# EAGLE board LB_SMD (EAGLE 5.11)
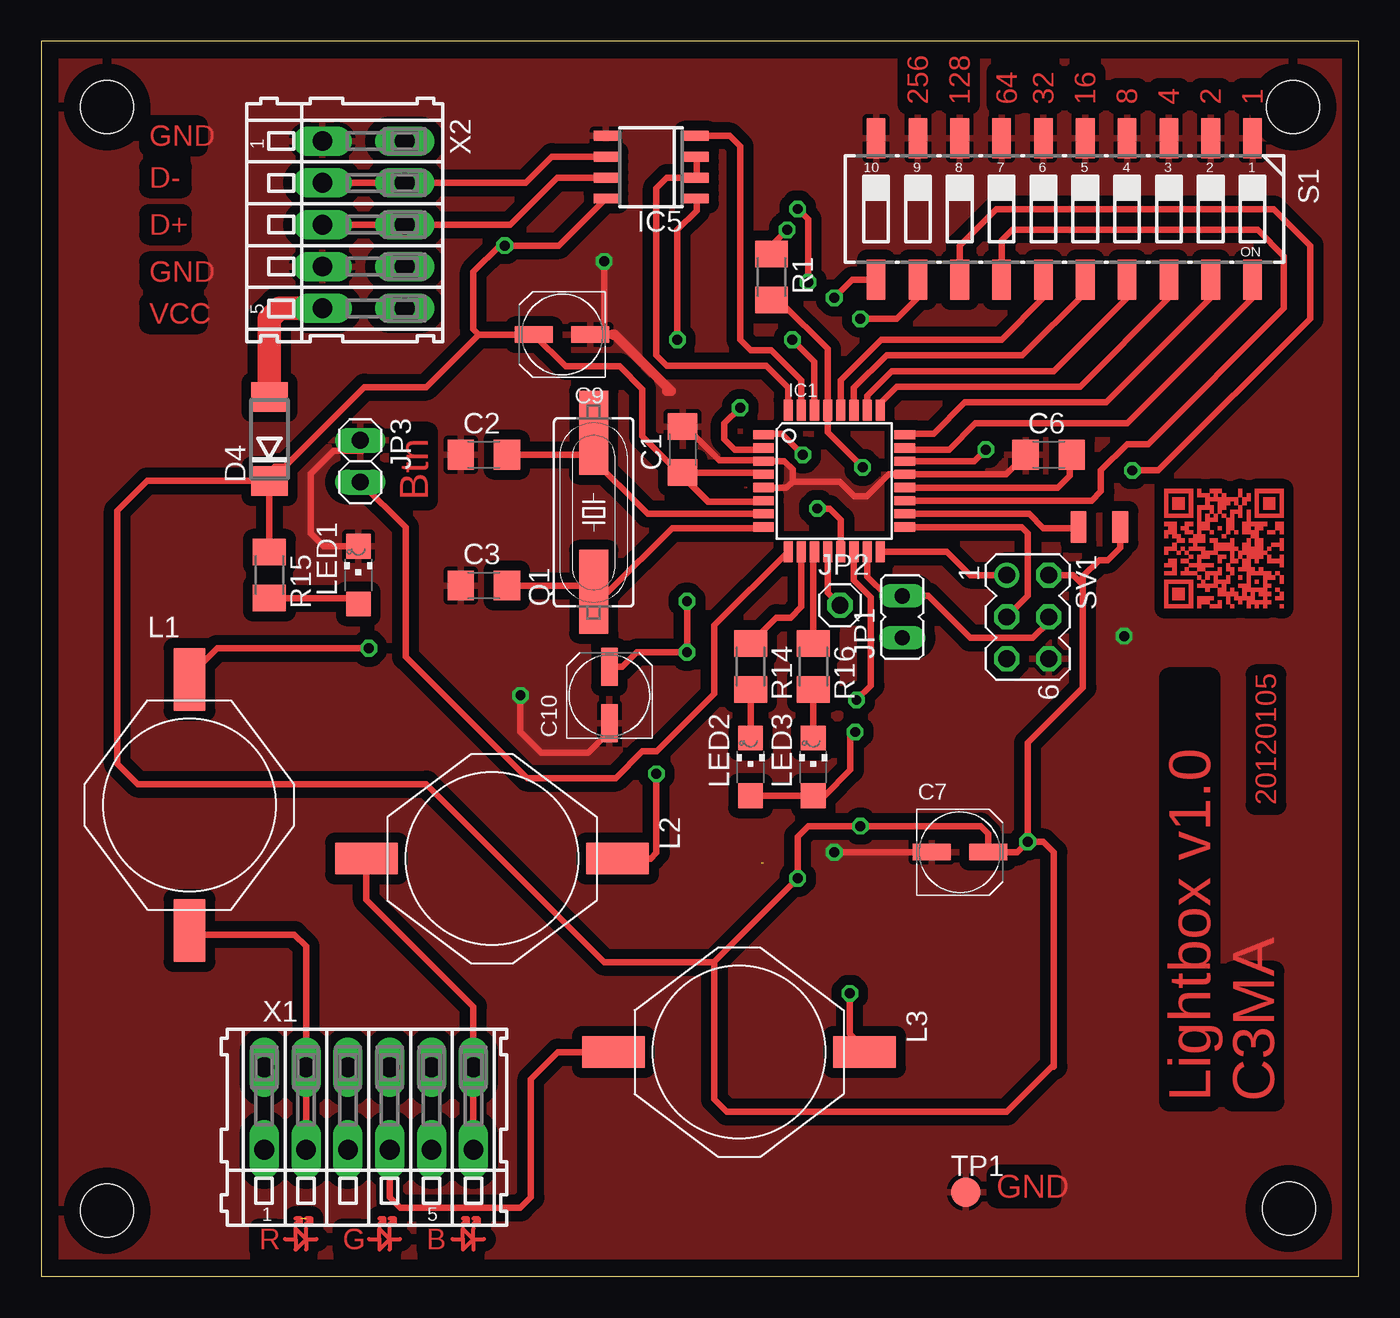
[diagram p0: board, top side]
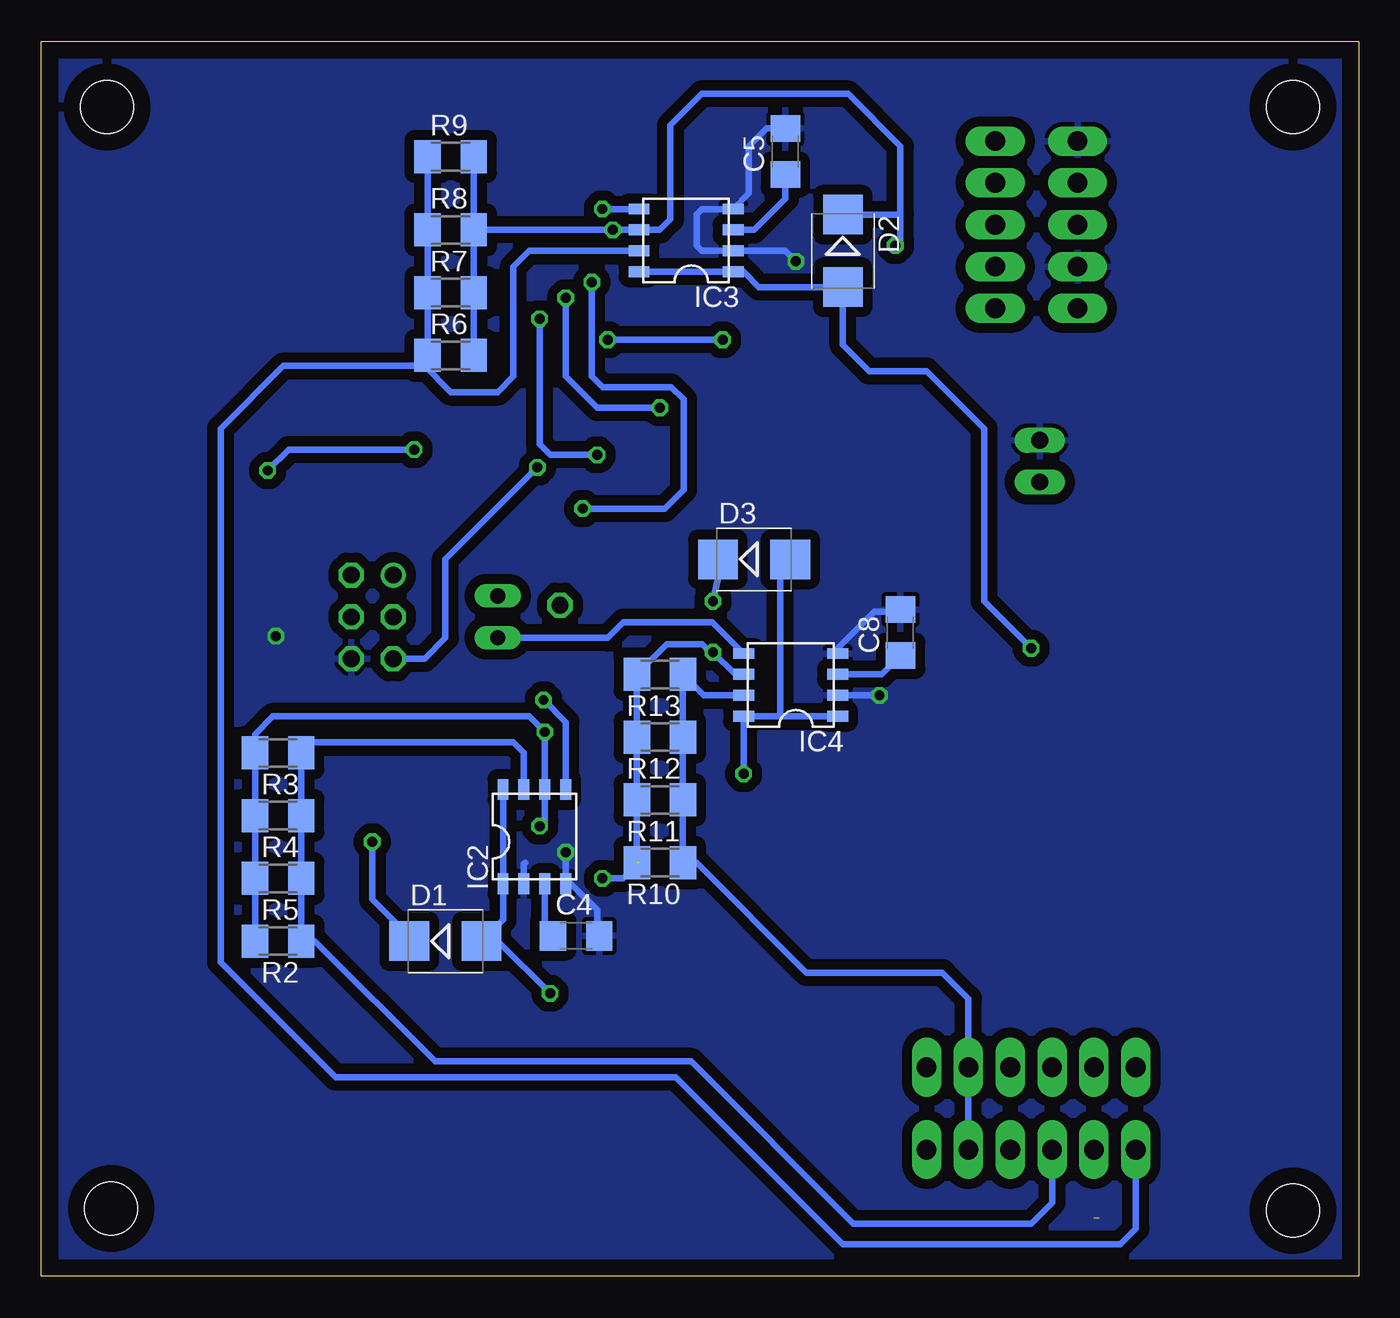
[diagram p1: board, bottom side, seen from below]

Size 80 x 75 mm. Coordinates in mm from the lower left corner, seen from the top.
Outline: 0,0 80,0 80,75 0,75 0,0
Copper layers (1*16): Top 0.035mm / dielectric 1.5mm / Bottom 0.035mm
Design rules "default": minimum track width 10mil, minimum drill 24mil, track to track 8mil, track to pad 8mil, pad to pad 8mil, via to via 8mil, smd to smd 8mil, copper to edge 40mil, drill to drill 8mil, minimum pad ring 10mil, minimum via ring 8mil, stop-mask expansion 4mil, vias tented up to drill 0mil, thermal gap 10mil
Holes 3.2 mm at 4,71 4,4 76,71 75.75,4.12

## Footprints (pad centres in the part's own frame; a part is rotated, then mirrored left to right if it is on the bottom)
C1206 = smd 1.6 x 1.8: 1 -1.4,0; 2 1.4,0
UD-5X5,8_NICHICON = smd 2.3 x 1: + 1.725,0; - -1.7,0
SMB = smd 2.4 x 2.4: A 2.2,0; C -2.2,0
DO214AA = smd 1.8 x 2.2: A 2.55,0; C -2.55,0
TQFP32-08 = smd 1.27 x 0.559: 1 -4.293,2.8; 2 -4.293,2; 3 -4.293,1.2; 4 -4.293,0.4; 5 -4.293,-0.4; 6 -4.293,-1.2; 7 -4.293,-2; 8 -4.293,-2.8; 17 4.293,-2.8; 18 4.293,-2; 19 4.293,-1.2; 20 4.293,-0.4; 21 4.293,0.4; 22 4.293,1.2; 23 4.293,2; 24 4.293,2.8 | smd 0.559 x 1.27: 9 -2.8,-4.293; 10 -2,-4.293; 11 -1.2,-4.293; 12 -0.4,-4.293; 13 0.4,-4.293; 14 1.2,-4.293; 15 2,-4.293; 16 2.8,-4.293; 25 2.8,4.293; 26 2,4.293; 27 1.2,4.293; 28 0.4,4.293; 29 -0.4,4.293; 30 -1.2,4.293; 31 -2,4.293; 32 -2.8,4.293
DIL08 = smd 0.66 x 1.27: P$1 -4.445,-2.54; P$2 -3.175,-2.54; P$3 -1.905,-2.54; P$4 -0.635,-2.54; P$5 -0.635,3.175; P$6 -1.905,3.175; P$7 -3.175,3.175; P$8 -4.445,3.175
D_R-PDSO-G8 = smd 0.6 x 1.5: 1 -1.905,-2.75; 2 -0.635,-2.75; 3 0.635,-2.75; 4 1.905,-2.75; 5 1.905,2.75; 6 0.635,2.75; 7 -0.635,2.75; 8 -1.905,2.75
JP1 = drill 0.914 long: 1 0,-1.27; 2 0,1.27
1X01 = drill 1.016 octagon: 1 0,0
1X02 = drill 1.016 long: 1 -1.27,0; 2 1.27,0
PIS2408 = smd 1.9 x 1.4: P$1 0,7.83; P$2 0,-7.83 | smd 1.93 x 3.81: P$3 0,7.62; P$4 0,-7.62
1206F = smd 0.965 x 1.93: P$1 -1.27,0; P$2 1.27,0
CHIPLED_1206 = smd 1.5 x 1.5: A 0,-1.75; C 0,1.75
SM49 = smd 5.08 x 1.778: 1 -4.826,0; 2 4.826,0
M1206 = smd 1.6 x 2: 1 -1.4,0; 2 1.4,0
CTS-219-10 = smd 1.13 x 2.44: 1 -11.43,-4.3; 2 -8.89,-4.3; 3 -6.35,-4.3; 4 -3.81,-4.3; 5 -1.27,-4.3; 6 1.27,-4.3; 7 3.81,-4.3; 8 6.35,-4.3; 9 8.89,-4.3; 10 11.43,-4.3; 11 11.43,4.3; 12 8.89,4.3; 13 6.35,4.3; 14 3.81,4.3; 15 1.27,4.3; 16 -1.27,4.3; 17 -3.81,4.3; 18 -6.35,4.3; 19 -8.89,4.3; 20 -11.43,4.3
MA03-2 = drill 1.016 round: 1 -2.54,-1.27 | drill 1.016 octagon: 2 -2.54,1.27; 3 0,-1.27; 4 0,1.27; 5 2.54,-1.27; 6 2.54,1.27
TP18R = smd 1.8 x 1.8: TP 0,0
233-506 = drill 1.2 long: A1 -6.35,2.5; A2 -3.81,2.5; A3 -1.27,2.5; A4 1.27,2.5; A5 3.81,2.5; A6 6.35,2.5; B1 -6.35,-2.5; B2 -3.81,-2.5; B3 -1.27,-2.5; B4 1.27,-2.5; B5 3.81,-2.5; B6 6.35,-2.5
233-505 = drill 1.2 long: A1 -5.08,2.5; A2 -2.54,2.5; A3 0,2.5; A4 2.54,2.5; A5 5.08,2.5; B1 -5.08,-2.5; B2 -2.54,-2.5; B3 0,-2.5; B4 2.54,-2.5; B5 5.08,-2.5

## Placement (x,y rotation side)
C1  100n  [C1206]  38.94,50.2 90 top
C2  22p  [C1206]  26.88,49.89 0 top
C3  22p  [C1206]  26.88,41.95 0 top
C4  100p  [C1206]  47.52,20.68 0 bottom
C5  60p  [C1206]  34.81,68.3 90 bottom
C6  100n  [C1206]  61.17,49.89 0 top
C7  47u  [UD-5X5,8_NICHICON]  55.77,25.76 0 top
C8  100p  [C1206]  27.83,39.09 90 bottom
C9  47u  [UD-5X5,8_NICHICON]  31.64,57.19 180 top
C10  47u  [UD-5X5,8_NICHICON]  34.5,35.28 90 top
D1  MBRS120  [SMB]  55.45,20.36 0 bottom
D2  MBRS120  [SMB]  31.32,62.27 270 bottom
D3  MBRS120  [SMB]  36.72,43.54 0 bottom
D4  MBRS 340  [DO214AA]  13.86,50.84 90 top
IC1  MEGA8-AI  [TQFP32-08]  48.15,48.3 0 top
IC2  MC34063AD  [DIL08]  47.52,26.39 0 bottom
IC3  MC34063AD  [DIL08]  40.53,65.44 90 bottom
IC4  MC34063AD  [DIL08]  34.18,38.46 90 bottom
IC5  75176AD  [D_R-PDSO-G8]  37.04,67.35 90 top
JP1  [JP1]  52.28,40.05 0 top
JP2  [1X01]  48.5,40.75 0 top
JP3  [1X02]  19.38,49.5 270 top
L1  L-PISR 470u  [PIS2408]  9,28.62 0 top
L2  L-PISR 470u  [PIS2408]  27.38,25.38 270 top
L3  L-PISR 470u  [PIS2408]  42.38,13.62 270 top
L4  10u  [1206F]  64.25,45.5 180 top
LED1  SMD LED 1206 RT  [CHIPLED_1206]  19.26,42.59 0 top
LED2  SMD LED 1206 GN  [CHIPLED_1206]  43.07,30.93 0 top
LED3  SMD LED 1206 GN  [CHIPLED_1206]  46.88,30.93 0 top
Q1  8,0000-HC49 SMD  [SM49]  33.55,46.4 90 top
R1  10k  [M1206]  44.34,60.68 270 top
R2  1,0  [M1206]  65.61,20.36 180 bottom
R3  1,0  [M1206]  65.61,31.79 180 bottom
R4  1,0  [M1206]  65.61,27.98 180 bottom
R5  2,2  [M1206]  65.61,24.17 180 bottom
R6  1,0  [M1206]  55.13,55.92 0 bottom
R7  1,0  [M1206]  55.13,59.73 0 bottom
R8  1,0  [M1206]  55.13,63.54 0 bottom
R9  2,2  [M1206]  55.13,67.98 0 bottom
R10  1,0  [M1206]  42.44,25.12 180 bottom
R11  1,0  [M1206]  42.44,28.93 180 bottom
R12  1,0  [M1206]  42.44,32.74 180 bottom
R13  2,2  [M1206]  42.44,36.55 180 bottom
R14  150  [M1206]  43.07,37.03 270 top
R15  150  [M1206]  13.86,42.59 270 top
R16  150  [M1206]  46.88,37.03 270 top
S1  NT-10 SMD  [CTS-219-10]  62.12,64.81 180 top
SV1  WSL 6G  [MA03-2]  59.9,40.05 270 top
TP1  TPTP18R  [TP18R]  56.12,5.12 0 top
X1  [233-506]  19.89,10.2 0 top
X2  [233-505]  19.57,63.86 270 top

## Library data of the parts
C1-C10 R1-R16 = rcl
D1-D4 = diode
IC1 = atmel; MPN: ATMEGA8-16AU; OC_FARNELL: 9171371; OC_NEWARK: 73M8863
IC2-IC4 = MC34063AD
IC5 = 751xx
JP1 = jumper
JP2 JP3 = pinhead
L1-L3 = inductor-fastron_pisr
L4 = inductor-fastron
LED1-LED3 = led
Q1 = crystal; OC_FARNELL: unknown; OC_NEWARK: unknown
S1 = switch-dil; MF: SLI (CML/IDI); MPN: 219-10PK; OC_FARNELL: unknown; OC_NEWARK: 19M0224
SV1 = con-lstb; OC_FARNELL: unknown; OC_NEWARK: unknown
TP1 = testpad
X1 = con-wago; MF: Wago Corporation; MPN: 0233-0506; OC_FARNELL: 1777100; OC_NEWARK: 79K2052
X2 = con-wago; MF: Wago Corporation; MPN: 0233-0505; OC_FARNELL: unknown; OC_NEWARK: 79K2051

## Nets
+5V: C1.1 C7.+ C9.+ C10.+ D1.C D2.C D3.C D4.C IC1.4 IC1.6 IC2.P$6 IC3.P$6 IC4.P$6 IC5.8 L4.P$1 LED2.A LED3.A R1.1 R2.2 R3.2 R4.2 R5.2 R6.2 R7.2 R8.2 R9.2 R10.2 R11.2 R12.2 R13.2 R15.1 SV1.2
B_L: L2.P$2 X1.B6
B_R: IC4.P$7 R10.1 R11.1 R12.1 R13.1 X1.B5
BUTTON: IC1.9 JP3.2
D+: IC5.7 X2.B3
D-: IC5.6 X2.B2
G_L: L3.P$2 X1.B4
G_R: IC2.P$7 R2.1 R3.1 R4.1 R5.1 X1.B3
GND: C1.2 C2.1 C3.1 C4.2 C5.2 C6.1 C7.- C8.2 C9.- C10.- IC1.3 IC1.5 IC1.21 IC2.P$2 IC2.P$4 IC3.P$2 IC3.P$4 IC4.P$2 IC4.P$4 IC5.5 JP3.1 LED1.C S1.1 S1.2 S1.3 S1.4 S1.5 S1.6 S1.7 S1.8 S1.9 S1.10 SV1.6 TP1.TP X2.B1 X2.B4
INT_DMX: IC1.32 IC5.2 IC5.3
MISO: IC1.16 SV1.1
MOSI: IC1.15 JP1.2 SV1.4
N$2: C3.2 IC1.8 Q1.1
N$3: C2.2 IC1.7 Q1.2
N$7: IC1.23 S1.20
N$9: C6.2 IC1.20
N$14: IC1.18 L4.P$2
N$15: IC1.24 S1.19
N$16: IC1.25 S1.18
N$17: IC1.26 S1.17
N$18: IC1.27 S1.16
N$19: IC1.28 S1.15
N$20: IC1.19 S1.14
N$21: D3.A IC4.P$1 IC4.P$8 L2.P$1
N$22: IC1.22 S1.13
N$27: IC1.10 R14.1
N$28: LED2.C R14.2
N$29: D4.A X2.B5
N$30: LED1.A R15.2
N$31: IC1.11 R16.1
N$33: LED3.C R16.2
N$45: C5.1 IC3.P$3
N$47: D2.A IC3.P$1 IC3.P$8 L1.P$1
N$52: C4.1 IC2.P$3
N$53: D1.A IC2.P$1 IC2.P$8 L3.P$1
N$59: C8.1 IC4.P$3
PWM_BLUE: IC4.P$5 JP1.1
PWM_GREEN: IC1.14 IC2.P$5
PWM_RED: IC1.13 IC3.P$5
R_L: L1.P$2 X1.B2
R_R: IC3.P$7 R6.1 R7.1 R8.1 R9.1 X1.B1
RESERVE: IC1.12 JP2.1
RESET: IC1.29 R1.2 SV1.5
RXD: IC1.30 IC5.1
SCK: IC1.17 SV1.3
T9: IC1.1 S1.12
T10: IC1.2 S1.11
TXD: IC1.31 IC5.4

## Tracks (layer width: path | path; a pad name or v marks a point on that pad's centre or on a via)
+5V  (via drill 0.6)  (1 unrouted)
  Top 0.406: D4.C R15.1 | D4.C 14.17,48.29 14.17,49.17 14.79,49.17 19.62,54 23.37,54 26.56,57.19 | IC5.8 31.43,62.59 v28.15,62.59 27.83,62.59 26.24,61 26.24,57.51 26.56,57.19 | 26.56,57.19 C9.+ 31.86,55.25 35.12,55.25 36.5,53.88 36.5,51 40.47,47.03 40.53,47.03 | R1.1 44.34,62.59 v45.29,63.54 | v59.9,26.39 59.26,25.76 C7.+ 57.49,26.89 57.04,27.34 v49.74,27.34 46.56,27.34 45.93,26.71 v45.93,24.17 40.85,19.09 | LED2.A LED3.A 47.56,29.18 49.12,30.75 49.12,32.77 v49.42,33.06 | C10.+ 35.27,37.01 36.16,37.9 v39.21,37.9 v39.21,41 | v59.9,26.39 60.85,26.39 61.48,25.76 61.48,12.74 61.37,12.74 58.62,10 41.62,10 40.88,10.75 40.88,19.06 40.85,19.09 | D4.C 6.42,48.3 4.62,46.5 4.62,31.12 5.87,29.89 23.39,29.89 34.18,19.09 40.85,19.09 | 40.53,47.03 38.94,48.62 C1.1 43.75,48.8 IC1.4 | 40.53,47.03 43.79,47.03 IC1.6 | v59.9,26.39 59.9,32.4 63.25,35.75 63.25,42 | SV1.2 62.66,42.59 63.25,42 | 63.25,42 63.25,42.5 64.25,43.5 64.75,43.5 65.5,44.25 65.5,45.48 L4.P$1
  Bottom 0.406: R6.2 R7.2 R8.2 | R8.2 R9.2 | R8.2 v45.29,63.54 IC3.P$6 42.44,63.54 41.8,64.17 41.8,69.89 39.9,71.8 31,71.8 27.83,68.62 27.83,64.49 | R2.2 R5.2 R4.2 R3.2 67.01,32.93 65.93,34.01 50.37,34.01 v49.42,33.06 IC2.P$6 49.42,27.66 v49.74,27.34 | R13.2 R12.2 R11.2 R10.2 | R13.2 43.7,36.68 | 27.83,64.49 27.83,62.91 v28.15,62.59 | D1.C 57.65,20.66 59.9,22.9 v59.9,26.39 | D2.C 27.85,64.47 27.83,64.49 | v45.93,24.17 44.66,24.17 43.7,25.12 | D3.C 38.92,42.29 v39.21,41 | IC4.P$6 37.87,36.55 v39.21,37.9 39.4,37.9 39.88,38.38 42.01,38.38 R13.2
B_L
  Top 0.406: X1.B6 26.24,16.38 19.75,22.88 19.75,25.17 L2.P$2
B_R
  Bottom 0.406: IC4.P$7 39.77,35.28 R13.1 R12.1 R11.1 R10.1 40.21,25.12 33.55,18.45 25.29,18.45 23.7,16.87 X1.B5
BUTTON
  Top 0.406: IC1.9 40.88,39.53 40.88,35.38 37.38,31.88 36.5,31.88 34.88,30.25 29.5,30.25 22.12,37.62 22.12,45.48 JP3.2
D+
  Top 0.406: IC5.7 31.32,66.72 28.46,63.86 X2.B3
D-
  Top 0.406: X2.B2 29.42,66.4 31,67.98 IC5.6
G_L
  Top 0.406: X1.B4 21.16,4.8 21.8,4.17 29.1,4.17 29.73,4.8 29.73,11.98 31.38,13.62 L3.P$2
G_R
  Bottom 0.406: IC2.P$7 50.69,31.79 51.33,32.42 64.34,32.42 64.21,32.3 R3.1 R4.1 R5.1 R2.1 63.39,20.36 56.09,13.06 40.53,13.06 30.69,3.21 19.89,3.21 18.62,4.49 X1.B3
GND  (via drill 0.6)
  Top 0.406: C9.- 34.18,57.19 | v48.15,25.76 C7.- | C10.- 34.5,33.06 33.23,31.79 30.37,31.79 29.1,33.06 v29.1,35.28 | 34.18,57.19 v34.18,61.63 | C6.1 58.58,48.7 IC1.21 51.45,48.7 50.12,47.38 49.38,47.38 48.5,48.25 45.62,48.25 | C1.2 39.13,51.6 41.16,49.57 43.79,49.57 IC1.3 45.12,49.5 45.62,49 45.62,48.25 | 34.18,57.19 34.69,57.19 | LED1.C 17.16,44.34 16.38,45.12 16.38,48.75 17.75,50.12 19.48,50.12 JP3.1 | 45.62,48.25 45.25,47.88 43.88,47.88 IC1.5
  Top 0.61: 34.69,57.19 34.81,57.19 38.25,53.75 38,53.75
  Bottom 0.406: C5.2 35.95,69.7 37.04,68.62 37.04,65.76 IC3.P$4 39.9,64.81 40.21,64.49 40.21,62.59 39.9,62.27 IC3.P$2 34.81,62.27 v34.18,61.63 | C4.2 46.24,20.81 46.24,22.27 47.83,23.85 IC2.P$4 v48.15,25.76 | C8.2 27.96,40.36 29.42,40.36 31.64,38.14 IC4.P$4 | v29.1,35.28 IC4.P$2 | IC2.P$2 50.69,25.06 50.62,25.12
  other vias: 65.75,38.88
  pour Top (isolate 0.61): 0.88,74.25 79.25,74.25 79.25,0.62 0.88,0.62
  pour Bottom (isolate 0.61): 1.12,74 79,74 79,1.12 1.12,1.12
INT_DMX
  Top 0.406: IC1.32 45.35,53.96 44.02,55.28 37.99,55.28 37.35,55.92 37.35,66.08 37.99,66.72 IC5.2 IC5.3
MISO
  Top 0.406: IC1.16 54.98,44.01 56.41,42.59 SV1.1
MOSI
  Top 0.406: IC1.15 50.15,42.49 51.33,41.31 JP1.2 53.87,41.31 56.41,38.77 60.22,38.77 61.17,39.73 SV1.4
N$1
  Top 0.254: 14.81,2.26 15.45,2.26 | 15.45,2.26 15.45,2.9 16.08,2.26 15.45,1.63 15.45,2.26
N$2
  Top 0.406: IC1.8 43.8,45.44 38.31,45.44 34.43,41.57 Q1.1 33.16,41.95 C3.2
N$3
  Top 0.406: C2.2 33.23,49.89 | 33.23,49.89 33.23,50.9 Q1.2 | IC1.7 36.81,46.3 33.23,49.89
N$4
  Top 0.254: 16.08,2.26 16.08,2.9 | 16.08,2.26 16.08,1.63 | 16.08,2.26 16.72,2.26
N$5  (1 unrouted)
  Top 0.254: 16.4,3.53 16.08,3.21 | 16.4,3.53 16.08,3.53 | 16.4,3.53 16.4,3.21 | 15.77,3.53 15.45,3.53 | 15.77,3.53 15.77,3.21 | 15.45,3.21 15.77,3.53
N$6
  Top 0.254: 19.89,2.26 20.53,2.26 | 20.53,2.26 20.53,2.9 21.16,2.26 | 20.53,2.26 20.53,1.63 21.16,2.26 | 21.16,2.26 21.16,2.9 | 21.16,2.26 21.16,1.63 | 21.16,2.26 21.8,2.26
N$7
  Top 0.406: S1.20 73.55,59.41 65.93,51.79 56.72,51.79 55.13,50.2 52.54,50.2 IC1.23
N$8
  Top 0.254: 20.84,3.53 20.53,3.21 | 20.84,3.53 20.53,3.53 | 20.84,3.21 20.84,3.53
N$9
  Top 0.406: IC1.20 61.72,47.9 62.44,48.62 62.44,49.76 C6.2
N$10
  Top 0.254: 21.48,3.53 21.16,3.21 | 21.48,3.53 21.16,3.53 | 21.48,3.53 21.48,3.21
N$11
  Top 0.254: 24.97,2.26 25.61,2.26 | 25.61,2.26 25.61,2.9 26.24,2.26 | 25.61,2.26 25.61,1.63 26.24,2.26 | 26.24,2.26 26.24,2.9 | 26.24,2.26 26.24,1.63 | 26.24,2.26 26.88,2.26
N$12
  Top 0.254: 25.93,3.53 25.61,3.21 | 25.93,3.53 25.61,3.53 | 25.93,3.21 25.93,3.53
N$13
  Top 0.254: 26.56,3.53 26.24,3.21 | 26.56,3.53 26.24,3.53 | 26.56,3.53 26.56,3.21
N$14
  Top 0.406: IC1.18 59.99,46.3 60.85,45.44 62.98,45.44 L4.P$2
N$15
  Top 0.406: S1.19 71.01,59.41 64.66,53.06 56.09,53.06 54.18,51.16 52.5,51.16 IC1.24
N$16
  Top 0.406: IC1.25 50.95,53.01 51.96,54.02 63.07,54.02 68.47,59.41 S1.18
N$17
  Top 0.406: IC1.26 50.15,53.48 51.64,54.97 61.48,54.97 65.93,59.41 S1.17
N$18
  Top 0.406: IC1.27 49.35,53.95 51.33,55.92 59.58,55.92 63.39,59.73 S1.16
N$19
  Top 0.406: IC1.28 48.55,54.41 51.01,56.87 58.31,56.87 60.85,59.41 S1.15
N$20
  Top 0.406: S1.14 58.31,62.91 58.95,63.54 73.87,63.54 75.45,61.95 75.45,58.78 67.2,50.52 65.93,50.52 64.34,48.94 64.34,47.66 63.78,47.1 IC1.19
N$21  (via drill 0.6)
  Top 0.406: v37.35,30.52 37.35,25.73 37,25.38 L2.P$1
  Bottom 0.406: 35.13,34.01 IC4.P$8 v37.35,30.52 | 35.13,34.01 IC4.P$1 | D3.A 35.13,43.54 35.13,34.01
N$22  (via drill 0.6)
  Top 0.406: S1.13 55.77,62.59 57.99,64.81 74.82,64.81 77.04,62.59 77.04,58.14 67.83,48.94 v66.25,48.94 | IC1.22 56.65,49.5 v57.36,50.2
  Bottom 0.406: v57.36,50.2 64.98,50.2 v66.25,48.94
N$27
  Top 0.406: IC1.10 46.15,40.65 45.5,40 44.63,40 R14.1
N$28
  Top 0.406: LED2.C R14.2
N$29
  Top 1.422: X2.B5 14.49,58.78 13.86,58.14 D4.A
N$30
  Top 0.406: R15.2 18.91,41.19 LED1.A
N$31
  Top 0.406: IC1.11 46.88,44.01 R16.1
N$33
  Top 0.406: LED3.C R16.2
N$45
  Bottom 0.406: C5.1 34.81,65.44 36.72,63.54 IC3.P$3
N$47  (via drill 0.6)
  Top 0.406: v19.89,38.14 10.69,38.14 L1.P$1
  Bottom 0.406: IC3.P$8 IC3.P$1 37.35,61 36.42,60.07 D2.A 31.32,56.55 29.73,54.97 26.24,54.97 22.75,51.48 22.75,41 v19.89,38.14
N$52
  Bottom 0.406: IC2.P$3 49.42,20.68 C4.1
N$53  (via drill 0.6)
  Top 0.406: v49.1,17.18 49.1,14.73 L3.P$1
  Bottom 0.406: IC2.P$8 IC2.P$1 51.96,21.65 D1.A 52.28,20.36 v49.1,17.18
N$59
  Bottom 0.406: C8.1 28.97,36.55 IC4.P$3
PWM_BLUE
  Bottom 0.406: IC4.P$5 39.26,39.73 44.66,39.73 45.61,38.77 JP1.1
PWM_GREEN  (via drill 0.6)
  Top 0.406: IC1.14 49.35,42.27 50.38,41.25 50.38,35.88 v49.5,35
  Bottom 0.406: IC2.P$5 48.15,33.65 v49.5,35
PWM_RED  (via drill 0.6)
  Top 0.406: v45.93,64.81 46.56,64.17 v46.56,60.37 | IC1.13 48.55,45.95 47.88,46.62 v47.12,46.62
  Bottom 0.406: v45.93,64.81 IC3.P$5 | v46.56,60.37 46.56,54.65 45.91,54 41.75,54 41,53.25 41,47.75 42.12,46.62 v47.12,46.62
R_L
  Top 0.406: X1.B2 16.08,20.04 15.38,20.75 9.04,20.75 L1.P$2
R_R
  Bottom 0.406: R9.1 R8.1 R7.1 R6.1 | IC3.P$7 50.37,62.27 51.33,61.32 51.33,54.65 52.28,53.7 55.13,53.7 56.72,55.28 56.72,55.73 R6.1 | X1.B1 13.54,2.9 14.49,1.95 31.32,1.95 41.48,12.11 62.12,12.11 69.11,19.09 69.11,51.48 65.3,55.28 57.17,55.28 R6.1
RESERVE
  Top 0.406: JP2.1 47.75,41.5 IC1.12
RESET  (via drill 0.6)
  Top 0.406: R1.2 44.53,59.09 44.98,59.09 47.75,56.32 IC1.29 47.75,51.25 v49.88,49.12
  Bottom 0.406: SV1.5 56.72,37.51 55.45,38.77 55.45,43.55 v49.88,49.12
RXD  (via drill 0.6)
  Top 0.406: IC5.1 39.79,64.7 38.62,63.54 v38.62,56.87 | IC1.30 46.95,55.53 v45.61,56.87
  Bottom 0.406: v38.62,56.87 v45.61,56.87
SCK
  Top 0.406: IC1.17 59.52,45.5 59.9,45.12 59.9,41.31 SV1.3
T9  (via drill 0.6)
  Top 0.406: S1.12 53.23,59.41 51.96,58.14 v49.74,58.14 | v46.24,49.89 44.98,51.16 43.91,51.16 IC1.1
  Bottom 0.406: v49.74,58.14 49.74,50.52 49.1,49.89 v46.24,49.89
T10  (via drill 0.6)
  Top 0.406: S1.11 49.25,60.51 v48.15,59.41 | v42.44,52.74 41.48,51.79 41.48,50.84 42.12,50.2 43.76,50.2 IC1.2
  Bottom 0.406: v48.15,59.41 48.15,54.65 46.24,52.74 v42.44,52.74
TXD
  Top 0.406: IC1.31 46.15,54.43 44.34,56.24 43.07,56.24 42.44,56.87 42.44,68.62 41.8,69.25 IC5.4
(copper drawn outside any net)
  shapes: Top area x422

## Text on the board
Top: 256 | 128 | 64 | 32 | 16 | 8 | 4 | 2 | 1 | GND | D- | D+ | GND | VCC | Btn | 20120105 | Lightbox v1.0 | C3MA | GND | R | G | B